# Altium PCB Converter-PCB.PcbDoc
Units mil, origin at the board's own origin, x right, y up, seen from the top; angles counter-clockwise.
Board outline 6000 x 4000 mil, 2 copper layers (Top Layer, Bottom Layer); 10 components, 8 nets, 24 pads, 0 vias.
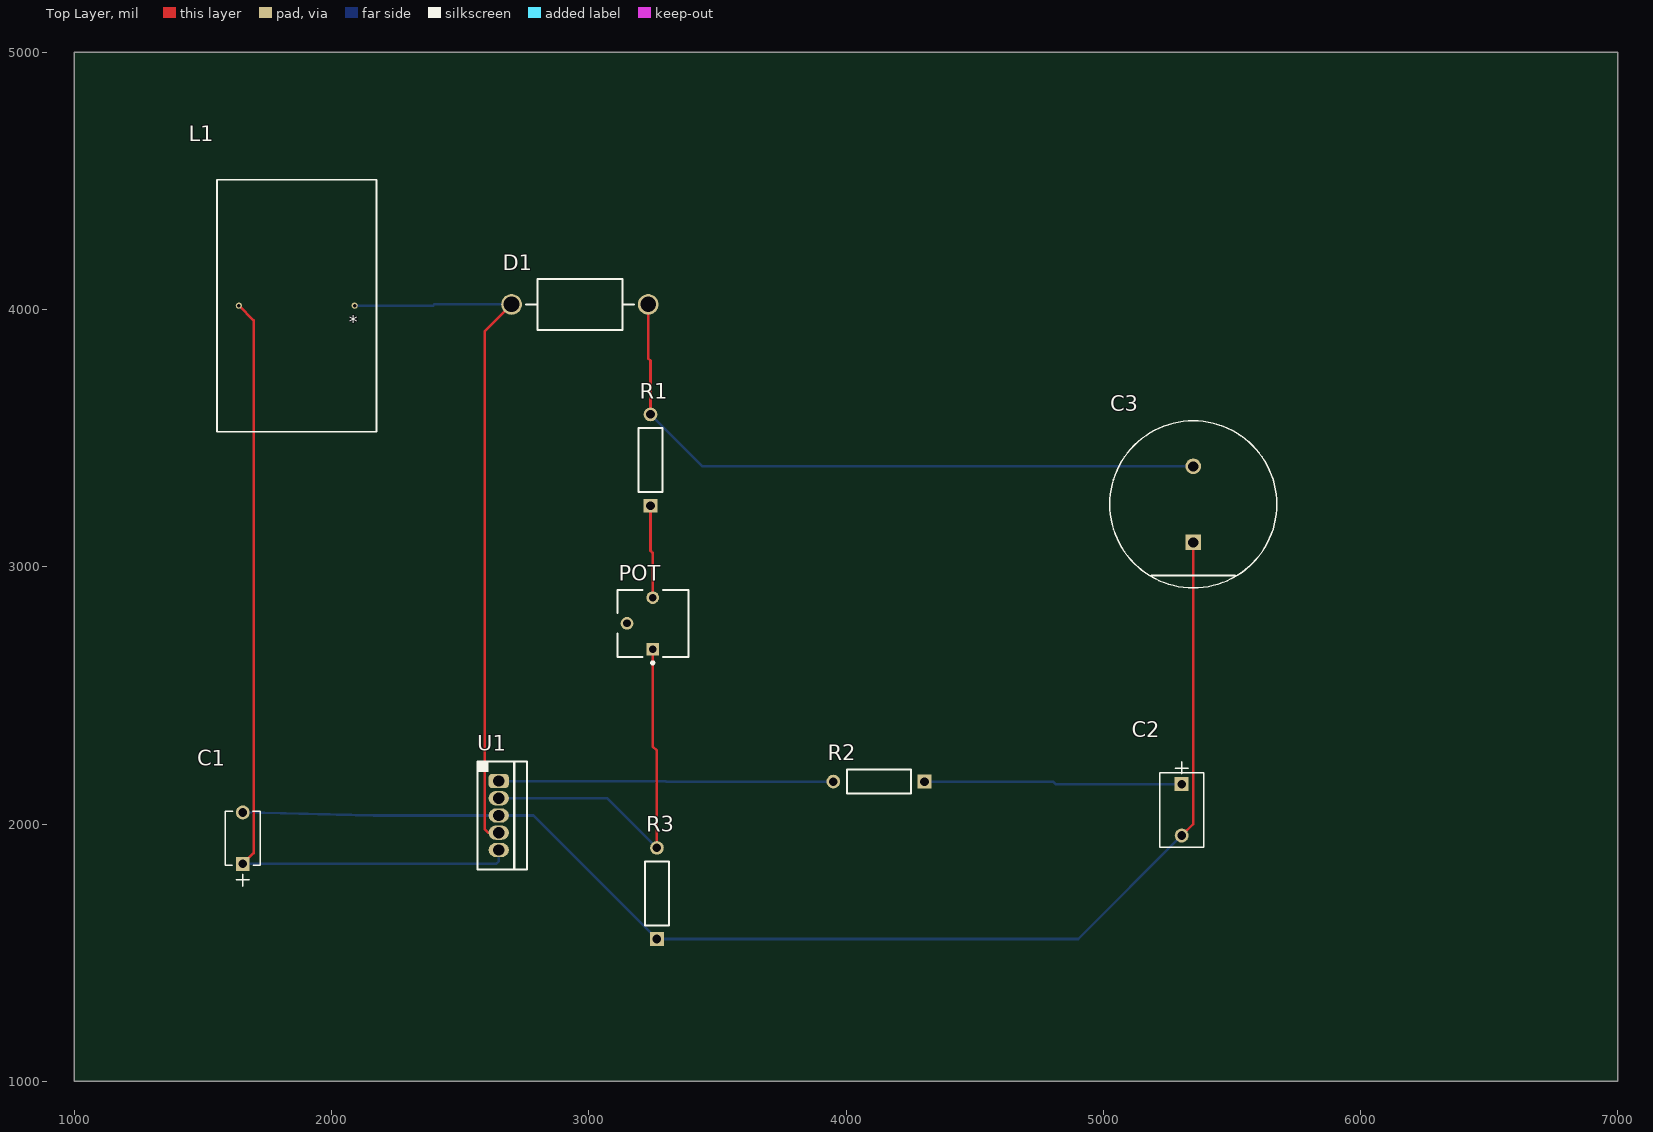
[diagram p0: Top Layer view]
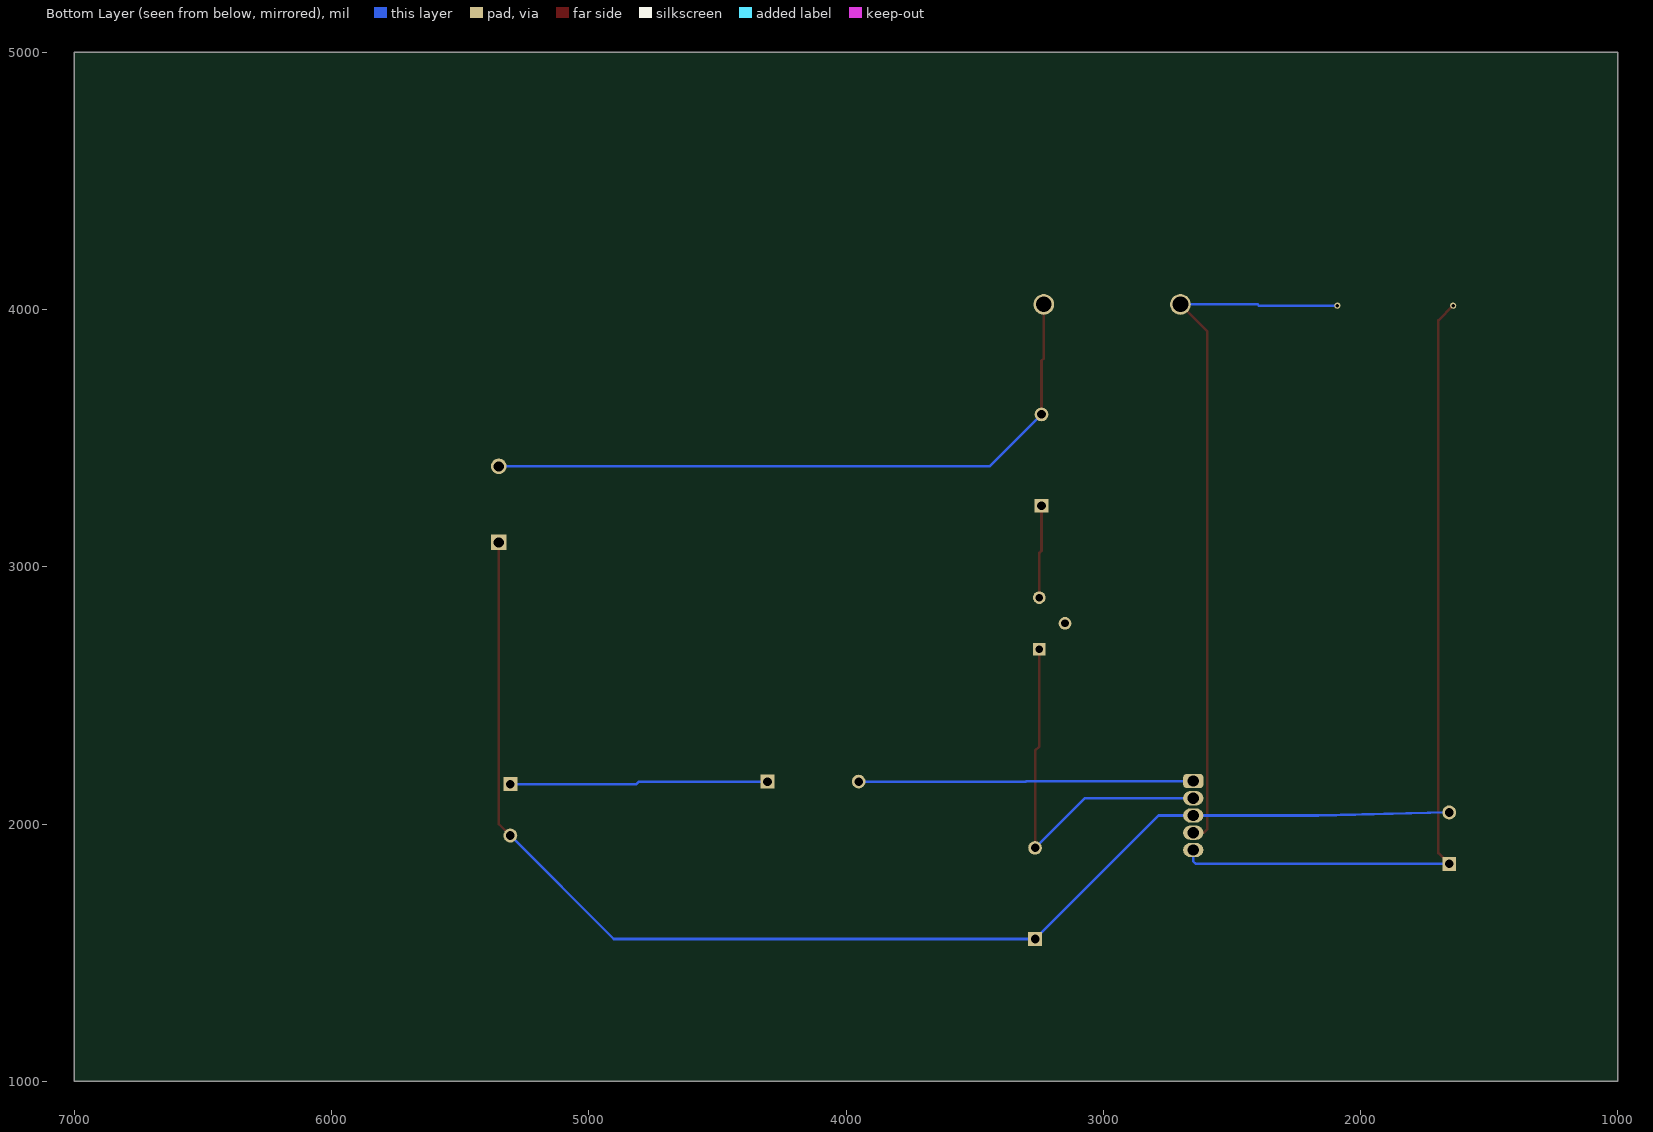
[diagram p1: Bottom Layer view, seen from below]

## Layer stack, top to bottom
Top Solder: solder mask 0.4, Solder Resist, Dk 3.5
Top Layer: signal copper 1.4
Dielectric 1: dielectric 12.6, FR-4, Dk 4.8
Bottom Layer: signal copper 1.4
Bottom Solder: solder mask 0.4, Solder Resist, Dk 3.5

## Board outline
1000,1000 7000,1000 7000,5000 1000,5000

## Design rules (kind name [scope] priority, off if disabled: settings)
Clearance [All] p1: gap=10 ignorepadtopadclearanceinfootprint=FALSE except(0: Arc-Hole Track-Hole SMDPad-Hole THPad-Hole Via-Hole Fill-Hole Poly-Hole Region-Hole Text-Hole)
PolygonConnect [All] p1: connectstyle=Relief reliefconductorwidth=10 reliefentries=4 polygonreliefangle="90 Angle" airgapwidth=10
RoomDefinition CONVERTER_ALTIUM [InComponentClass('CONVERTER_ALTIUM')] p1: confinementstyle=ConfineIn formatcopy=TRUE lockcomponents=FALSE outline 7045,1060 10975,1060 10975,2395 7045,2395
RoutingVias [All] p1: holewidth=28 width=50 viastyle="Through Hole" minholewidth=28 minwidth=50 maxholewidth=28 maxwidth=50
SolderMaskExpansion [All] p1: expansion=4 istentingtop=FALSE
Width [All] p1: maxlimit=10 minlimit=10 preferedwidth=10
30 further rules are at their usual default settings.

## Components (designator, comment, footprint, x,y, rotation, side; value= is the part's Value field where it differs from the comment)
C1 "0.18uF" CAP_C322C_MR_X7R_KEM 1655,1845 r90 top
C2 "0.33uF" CAP_C330_MR_X7R_KEM 5305,2155 r270 top
C3 "1000uF / 100V" FP-RAD-TH-D_16_0_5-L_25_2-MFG 5350,3242.64 r90 top
D1 "1N5821" ONSC-AXIAL_LEAD-2-267-05_V 2965.55,4020 r180 top
L1 "100uH" IND_PE-53115NL_PUL 2090,4015 r180 top
POT "100 kOhm" BOUR-3362P 3250,2780 r90 top
R1 "1 kOhm" RESA60-630X240 3240,3415 r90 top
R2 "2.2 kOhm" RESA60-630X240 4127.83,2165 r180 top
R3 "2.2 kOhm" RESA60-630X240 3265,1730 r90 top
U1 "LM2577T-ADJ/NOPB" KC0005A 2650,2033.07 r0 top

## Footprints (in the part's own frame and the unit in brackets; to place one, negate y for a bottom-side part, rotate by r counter-clockwise, add the part's x,y. Pads: shape width x height; smd on the part's side, far side on the other; paste and mask are expansions set on the pad)
BOUR-3362P [mm] "THD, 3-Leads, Body 6.6x6.99mm, Pitch 2.54mm"
  rect 1.25x1.25 hole 0.75: 1(-2.54,0.035)
  round 1.25 hole 0.75: 2(0,2.575) 3(2.54,0.035)
  silkscreen extent -4.02,-3.49 3.3,3.49, body extent -3.3,-3.49 3.3,3.49, height 4.95
CAP_C322C_MR_X7R_KEM [mil]
  rect 54x54 hole 34 mask+0: 1(0,0)
  round 54 hole 34 mask+0: 2(200,0)
  silkscreen extent -87,-68 205,68, body extent 0,0 10,10, height 10
CAP_C330_MR_X7R_KEM [mil]
  rect 54x54 hole 34 mask+0: 1(0,0)
  round 54 hole 34 mask+0: 2(200,0)
  silkscreen extent -87,-85 245,85, body extent 0,0 10,10, height 10
FP-RAD-TH-D_16_0_5-L_25_2-MFG [mm]
  rect 1.55x1.55 hole 1 paste-1000 mask+0: 1(-3.75,0)
  round 1.55 hole 1 paste-1000 mask+0: 2(3.75,0)
  silkscreen extent -8.25,-8.25 8.25,8.25, body extent -8.35,-8.35 8.35,8.35, height 0.25
IND_PE-53115NL_PUL [mil]
  round 24 hole 14 mask+0: 1(0,0) 2(450.39,0)
  silkscreen extent -85,-490 535,490, body extent -5,-485 460,485, height 1105
KC0005A [mm] "FM, 5-Leads, Body 10.16x8.46mm, Pitch 1.7mm"
  rrect50% 2x1.4 hole 1.1: 1(0,3.4)
  oval 2x1.4 hole 1.1: 2(0,1.7) 3(0,0) 4(0,-1.7) 5(0,-3.4)
  silkscreen extent -2.13,-5.36 2.8,5.35, body extent -2.08,-5.35 2.77,5.35, height 16.51
ONSC-AXIAL_LEAD-2-267-05_V [mm] "AXIAL, 2-Leads, Diameter 5.05mm"
  round 2.05 hole 1.55: 1(-6.745,0) 2(6.745,0)
  silkscreen extent -5.32,-2.53 5.32,2.53
RESA60-630X240 [mm] "Axial Resistor, 2-Leads, Dia 2.4mm, Body Length 6.3mm"
  rect 1.35x1.35 hole 0.85: 1(-4.5,0)
  round 1.35 hole 0.85: 2(4.5,0)
  silkscreen extent -3.15,-1.2 3.15,1.2, body extent -3.15,-1.2 3.15,1.2, height 2.4

## Part data
C1: library part C322C184K5R5TA, "No Description Available", Mfr_Name=Kemet, Copyright="Copyright (C) 2022 Ultra Librarian. All rights reserved.", Digi-Key_Part_Number_1=399-C322C184K5R5TA-ND, Manufacturer_Part_Number=C322C184K5R5TA, RefDes=RefDes, Type=DEV
C2: library part "0.33uF Cap", "No Description Available", Manufacturer_Part_Number=C330C334K5R5TA, Mfr_Name=Kemet, Copyright="Copyright (C) 2022 Ultra Librarian. All rights reserved.", Digi-Key_Part_Number_1=399-4408-ND, RefDes=RefDes, Type=DEV
C3: library part CMP-05427-000487-1, "Aluminum Electrolytic Capacitors (Radial Lead Type) 1000uF ±20% 50V", Capacitance=1mF, Case/Package=Radial, ESR (Equivalent Series Resistance)=16mR, Max Operating Temperature=105°C, Min Operating Temperature=-40°C, Package Quantity=250, Ripple Current=3.32A, Tolerance=20%, Voltage Rating=50V, Contact Plating=Tin, Diameter=16mm, Features="General Purpose", Height=25mm, Height - Seated (Max)=0.984inch, Impedance=16mR, Lead Diameter=0.8mm, Lead Free="Lead Free", Lead Pitch=7.5mm, Length=25mm, Life (Hours)=10000Hour, Mount="Through Hole", Number of Pins=2, Packaging="Tape and Reel", Polarity=Polar, Radiation Hardening=No, REACH SVHC="No SVHC", RoHS Compliant=Yes, Series=FR, Termination="Through Hole", Voltage Rating (DC)=50V
D1: library part CMP-1055-00029-1, "Rectifier, 2-Pin Axial_Lead, Bulk Bag", Manufacturer="On Semiconductor", ComponentLink1Description="Manufacturer URL", ComponentLink1URL=http://www.onsemi.com/, ComponentLink2Description=Datasheet, ComponentLink2URL=http://www.onsemi.cn/pub_link/Collateral/1N5820-D.PDF, ComponentLink3Description="Package Specification", ComponentLink3URL=http://www.onsemi.com/pub_link/Collateral/267-05.PDF, Configuration=Single, DatasheetVersion="Rev. 10", IFSM Max (A)=80, Mounting Technology="Through Hole", Note1=0, PackageDescription="2-Pin, Axial Lead, Diameter 5.05 mm", PackageReference=AXIAL_LEAD-2-267-05, PackageVersion="Rev. G, 06/2000", Packing="Bulk Bag", PartNumber=1N5821, RoHS=FALSE
L1: library part PE-53115NL, "No Description Available", Mfr_Name="Pulse Electronics Corporation", Copyright="Copyright (C) 2022 Ultra Librarian. All rights reserved.", Digi-Key_Part_Number_1=553-1566-5-ND, Manufacturer_Part_Number=PE-53115NL, RefDes=RefDes, Type=DEV
POT: library part CMP-1747-00004-1, "Square Trimpot(R) Trimming Potentiometer, 10 KOhm, 300 V, -55 to 125 degC, 3-Pin THD, RoHS, Tube", Case Code (Imperial)=0612, Case Code (Metric)=1632, Case/Package=1206, Max Operating Temperature=125degC, Min Operating Temperature=-25degC, Package Quantity=5000, Power Rating="1 W", Resistance="50 mohm", Tolerance=1%, Voltage Rating="220 mV", ComponentLink1Description="Manufacturer URL", ComponentLink1URL=http://www.bourns.com/, ComponentLink2Description=Datasheet, ComponentLink2URL=http://www.bourns.com/docs/Product-Datasheets/3362.pdf, DatasheetVersion=May-16, Height="0.6 mm", Length="3.2 mm", Mount="Surface Mount", PackageDescription="3-Pin Through Hole Device, Body 6.6 x 6.99 mm, Pitch 2.54 mm", PackageReference=3326P, Packaging="Tape and Reel", Pins=2, REACH SVHC="No SVHC", RoHSCompliant=True, Width="1.6 mm"
R1 R2 R3: library part CMP-1659-00075-1, "Axial Resistor, 1 KOhm, +/- 1%, 250 mW, -55 to 155 degC, 2-Pin THD, RoHS, Bulk", Case\Package=Axial, Max Operating Temperature="155 degC", Min Operating Temperature="-55 degC", Package Quantity=200, Power Rating="250 mW", Resistance="10 kohm", Tolerance=1%, Voltage Rating="250 V", ComponentLink1Description="Manufacturer URL", ComponentLink1URL=http://www.yageo.com/, ComponentLink2Description=Datasheet, ComponentLink2URL=http://www.yageo.com/documents/recent/Yageo%20LR_MFR_2013.pdf, DatasheetVersion=Apr-13, Length="0.248 inch", PackageDescription="2-Pin Axial Lead, Dia 2.4 mm, Body Length 6.3 mm", PackageReference=MFR-25, Packaging=Bulk, RoHSCompliant=true
U1: library part CMP-0069-01999-3, "SIMPLE SWITCHER® Step-Up Voltage Regulator, 5-pin TO-220, Pb-Free", Manufacturer="Texas Instruments", PackageTopMarking=NSUZXYTTE#*LM2577T*-ADJ*P+, PowerWise=N, Code_JEDEC=TO-220-AB, ComponentLink1Description="Datasheet URL", ComponentLink1URL=http://www.ti.com/general/docs/lit/getliterature.tsp?genericPartNumber=LM2577&fileType=pdf, CompType=Switcher, PackageDescription="TO-220, Molded, 5 Lead, Straight", PackageReference=KC0005A, PinCount=5, RoHS=Y

## Nets (pads, with @x,y where several pads share a name; then routed paths per layer and width w, separated by ;. In a path a pad name is that pad's centre, name@x,y a point inside that pad or via, vN(x,y) a via of type N, cw(c..) or ccw(c..) an arc to the next point about the centre after c; other vN are vias at no path point)
GND: C1.2 C2.2 C3.1 R3.1 U1.3 | length 5174.3
  Top Layer w10: C2.2 5350,2000 C3.1
  Bottom Layer w10: C1.2 2163.93,2033.07 U1.3 2784.76,2033.07 R3.1 4902.83,1552.83 C2.2
NetC1_1: C1.1 L1.2 U1.5 | length 3254.5
  Top Layer w10: L1.2 1697,3957.61 1697,1887 C1.1
  Bottom Layer w10: C1.1 2640,1845 2650,1855 U1.5
NetC2_1: C2.1 R2.1 | length 1004.1
  Bottom Layer w10: R2.1 4805,2165 4815,2155 C2.1
NetC3_2: C3.2 D1.1 R1.2 | length 2625.1
  Top Layer w10: D1.1 3231.1,3809.9 3240,3801 R1.2
  Bottom Layer w10: R1.2 3441.89,3390.28 C3.2
NetD1_2: D1.2 L1.1 U1.4 | length 2756.3
  Top Layer w10: U1.4 2608.86,1966.14 2595,1980 2595,3915 D1.2
  Bottom Layer w10: L1.1 2395,4015 2400,4020 D1.2
NetPOT_1: POT.1 R3.2 U1.2 | length 1474.5
  Top Layer w10: POT.1 3248.62,2301.38 3265,2285 R3.2
  Bottom Layer w10: U1.2 3072.17,2100 R3.2
NetPOT_3: POT.3 R1.1 | length 361.4
  Top Layer w10: R1.1 3240,3062.62 3248.62,3054 POT.3
NetR2_2: R2.2 U1.1 | length 1301.5
  Bottom Layer w10: U1.1 3299,2166.93 3300.93,2165 R2.2
pads on no net: POT.2

## Text inside footprints (layer, text, board x,y; h text height)
L1: Top Overlay "*" at 2102.5,3998 h50 r180; Mechanical 13 "*" at 2172.3,4040 h50 r180